# EAGLE board SparkFun RTK Facet - Main-Panel (EAGLE 9.6.2), part 1 of 7
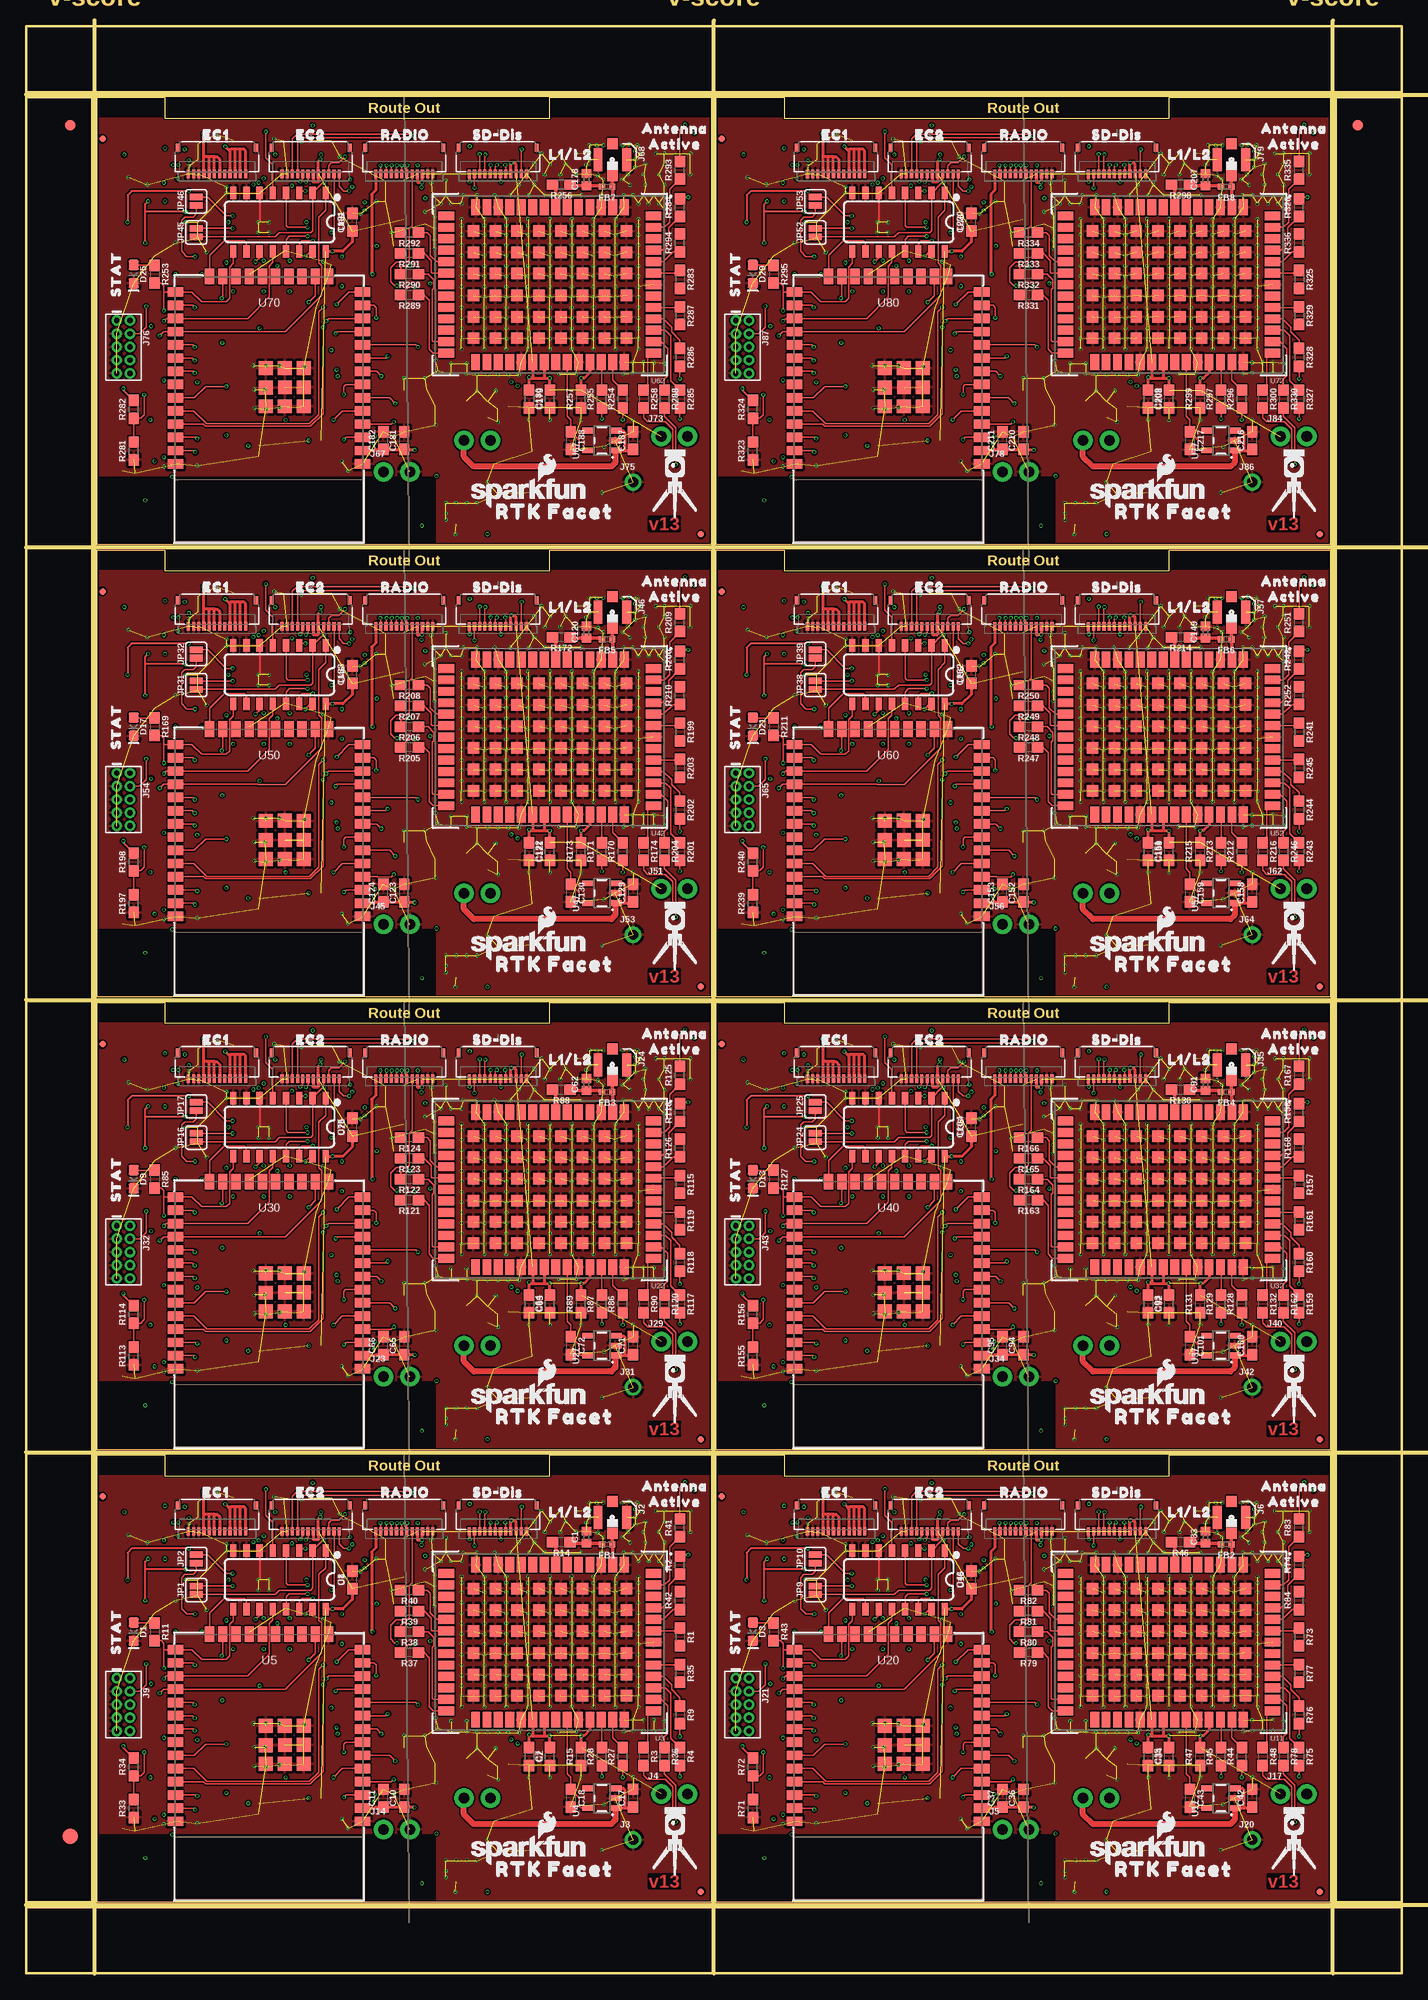
[diagram p0: board, top side]
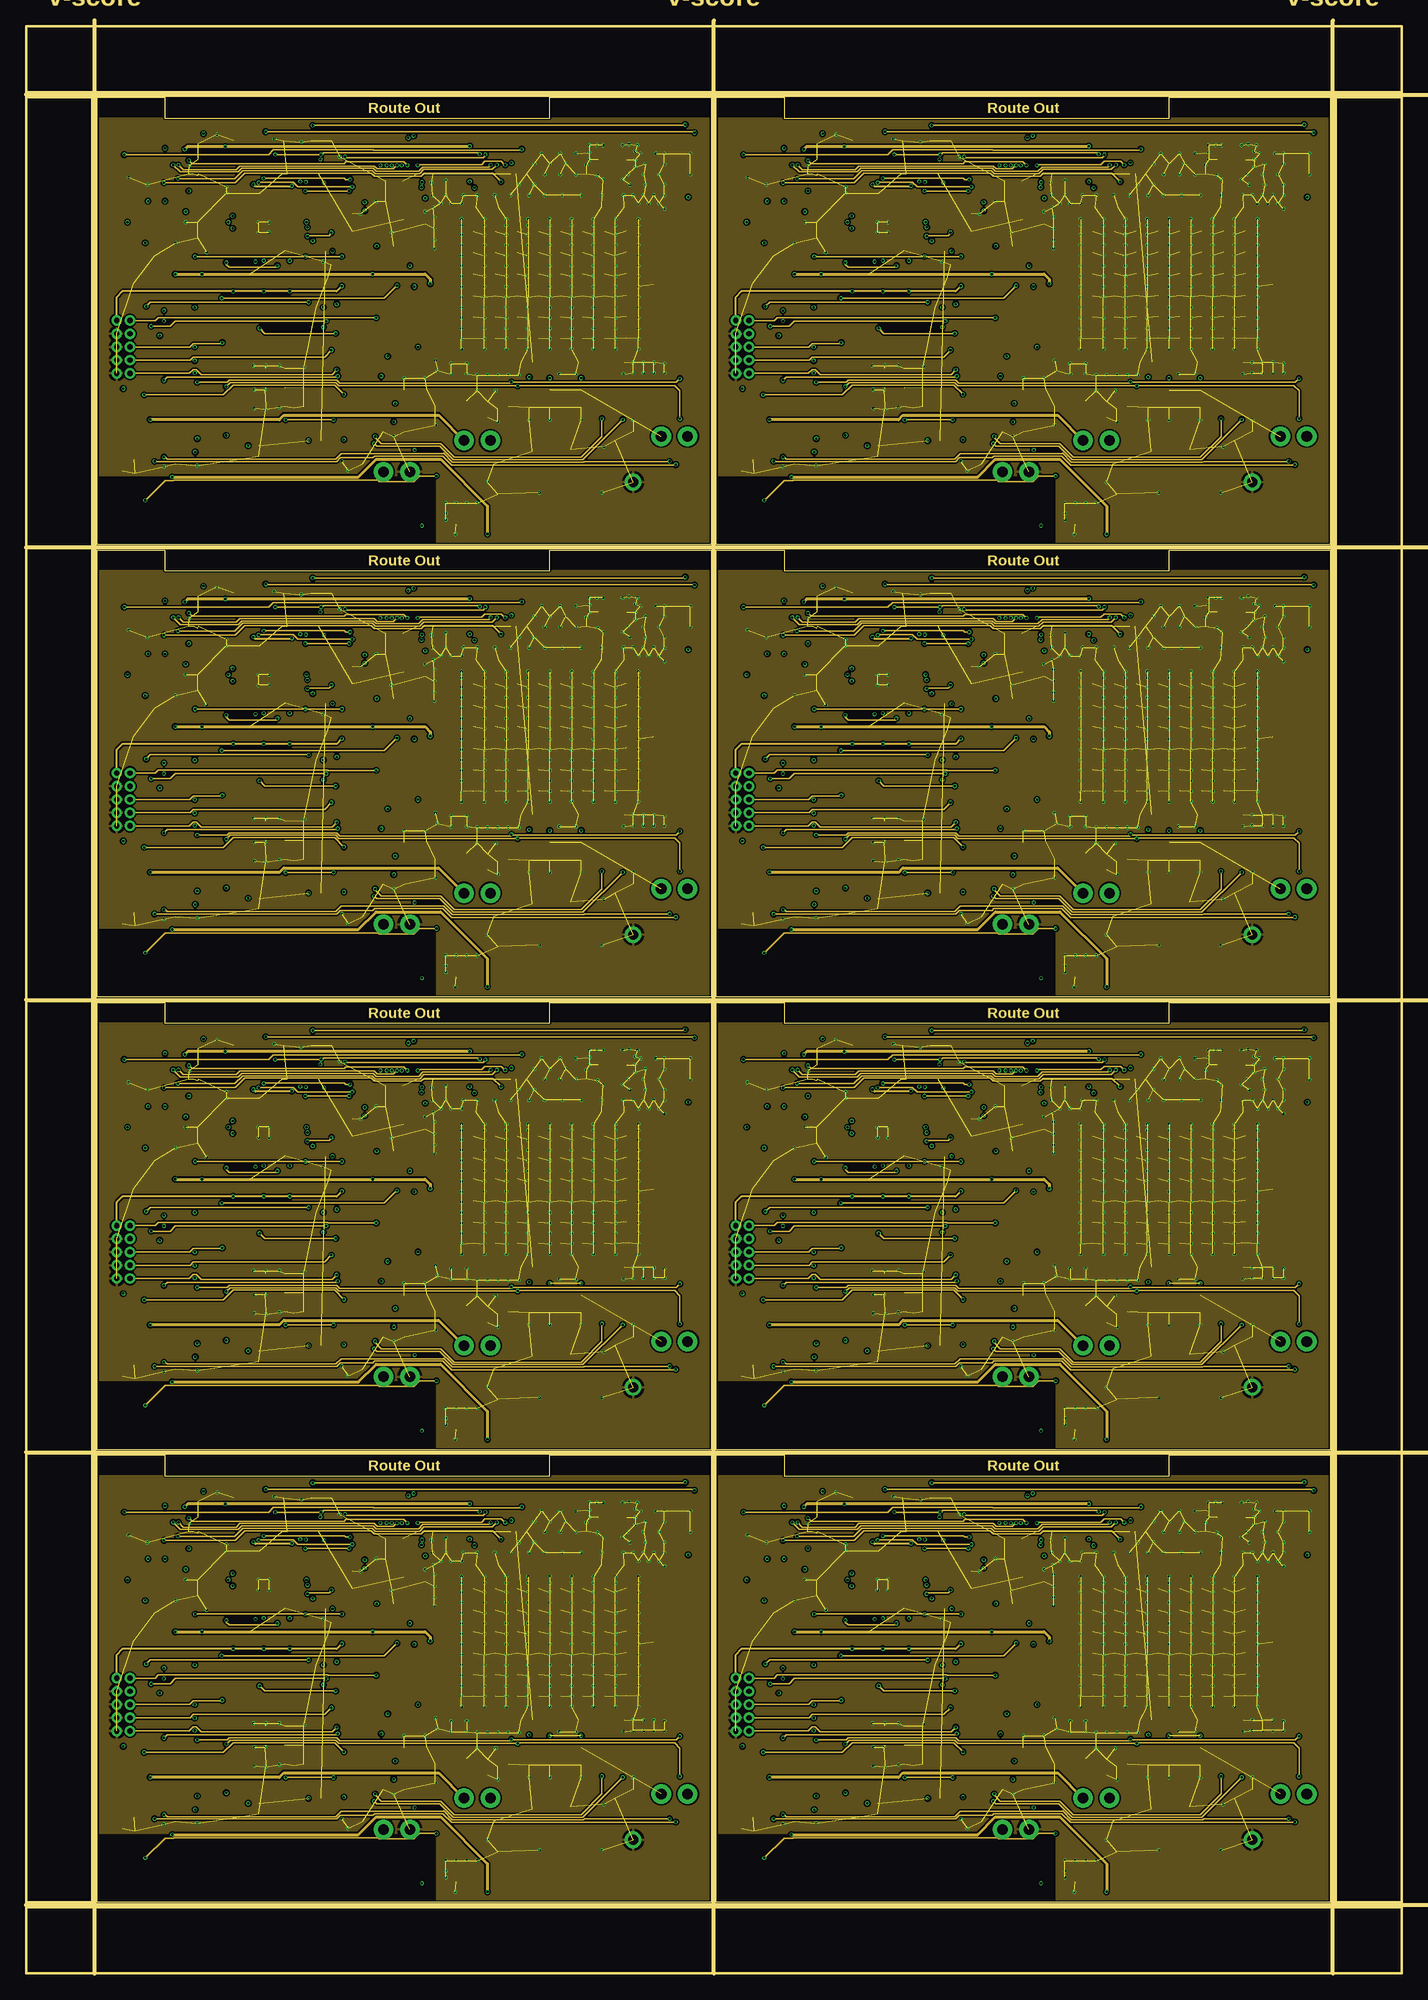
[diagram p1: board, inner layer Route2]
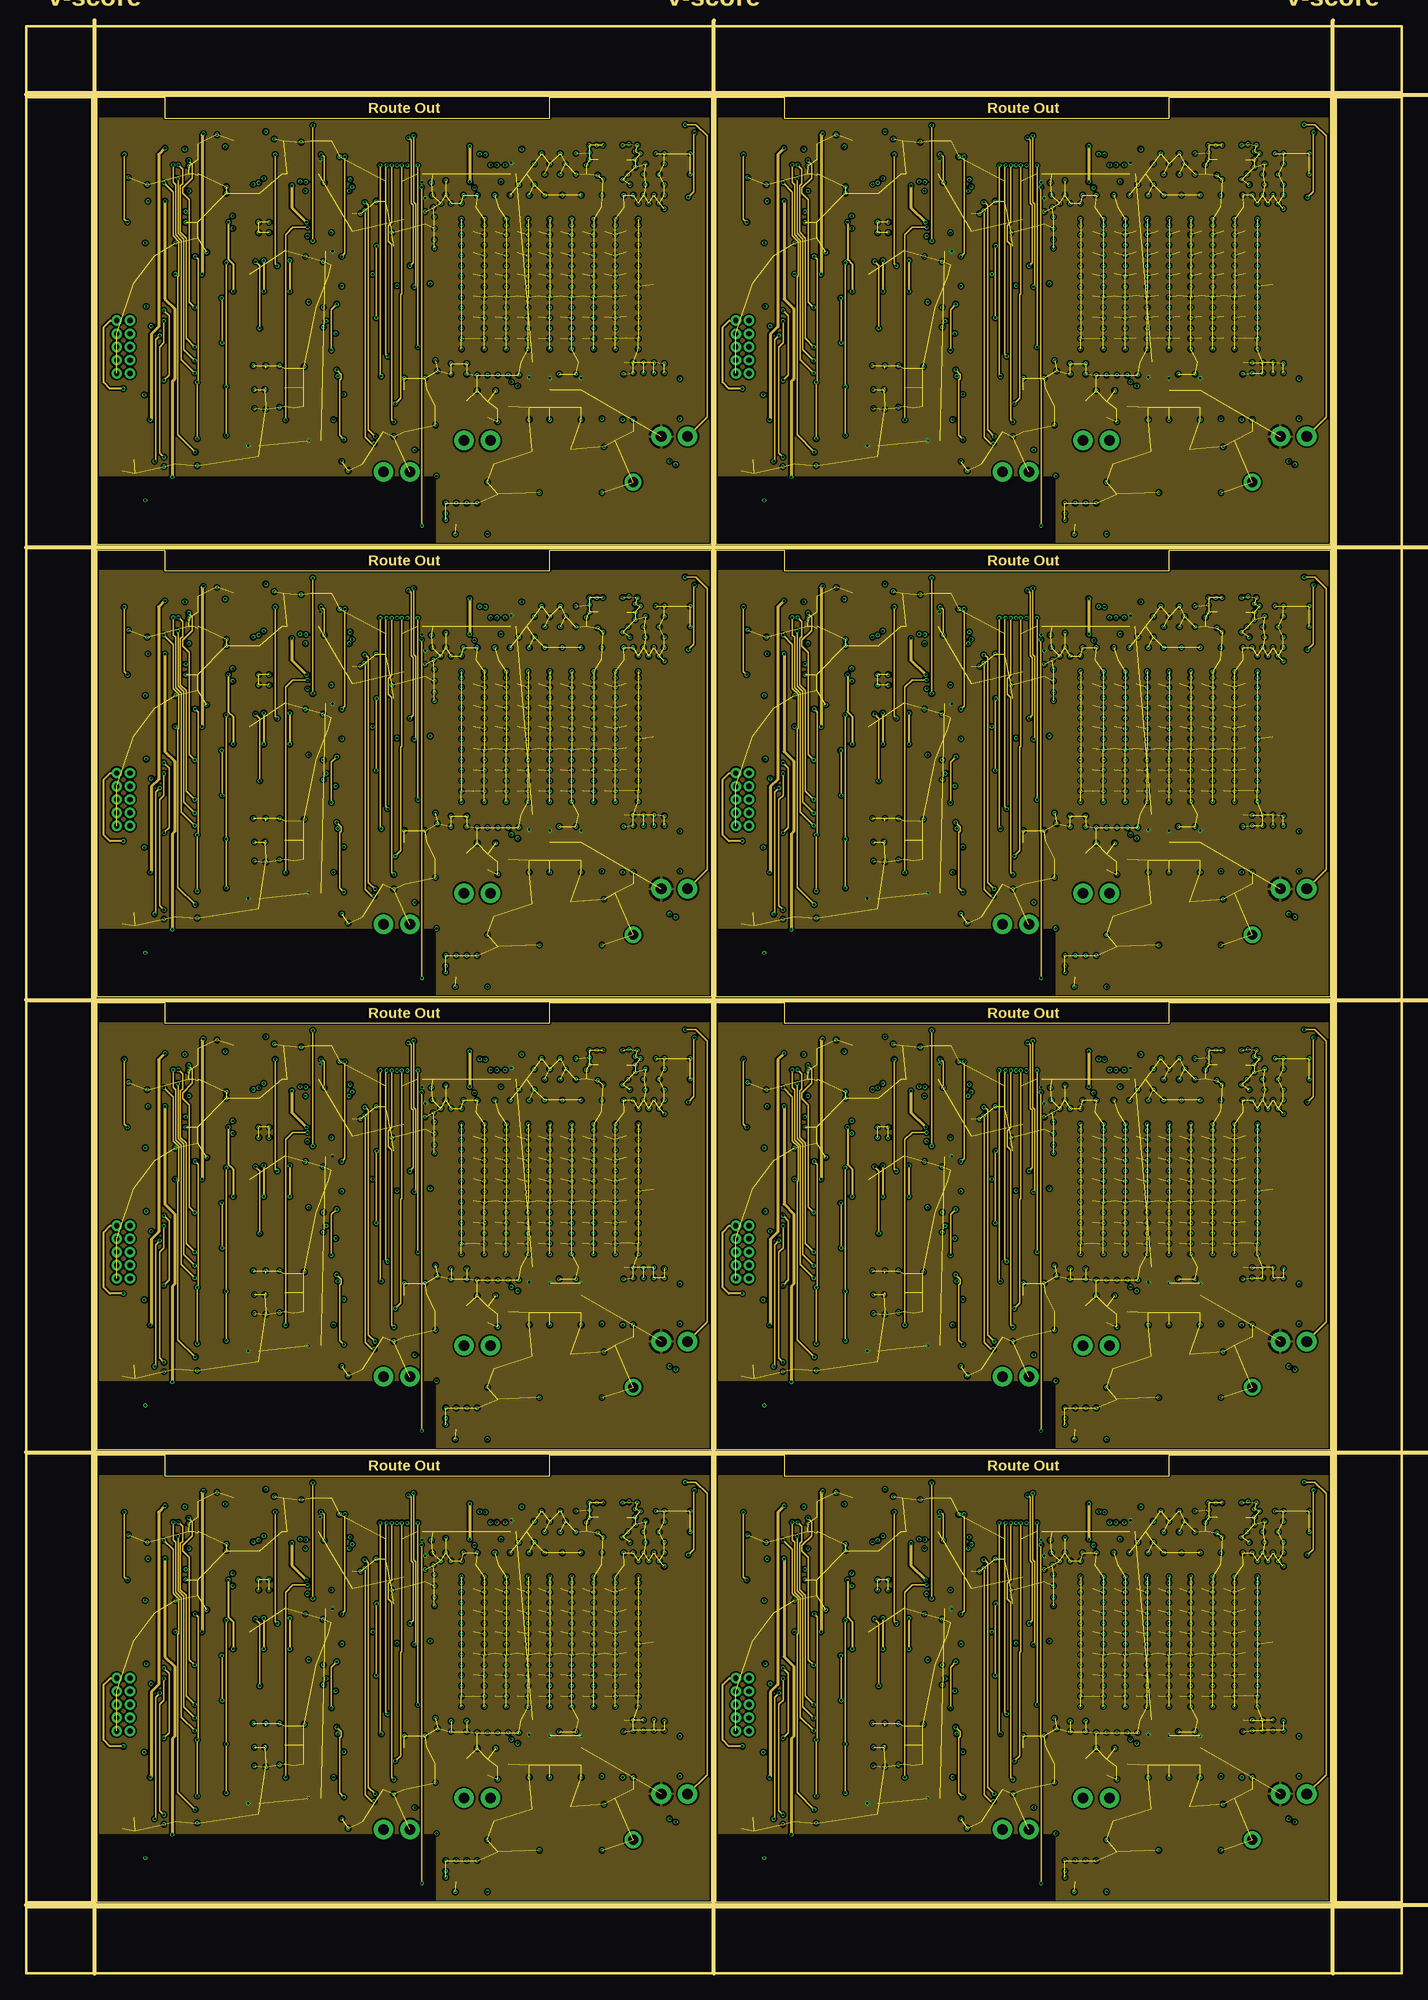
[diagram p2: board, inner layer Route15]
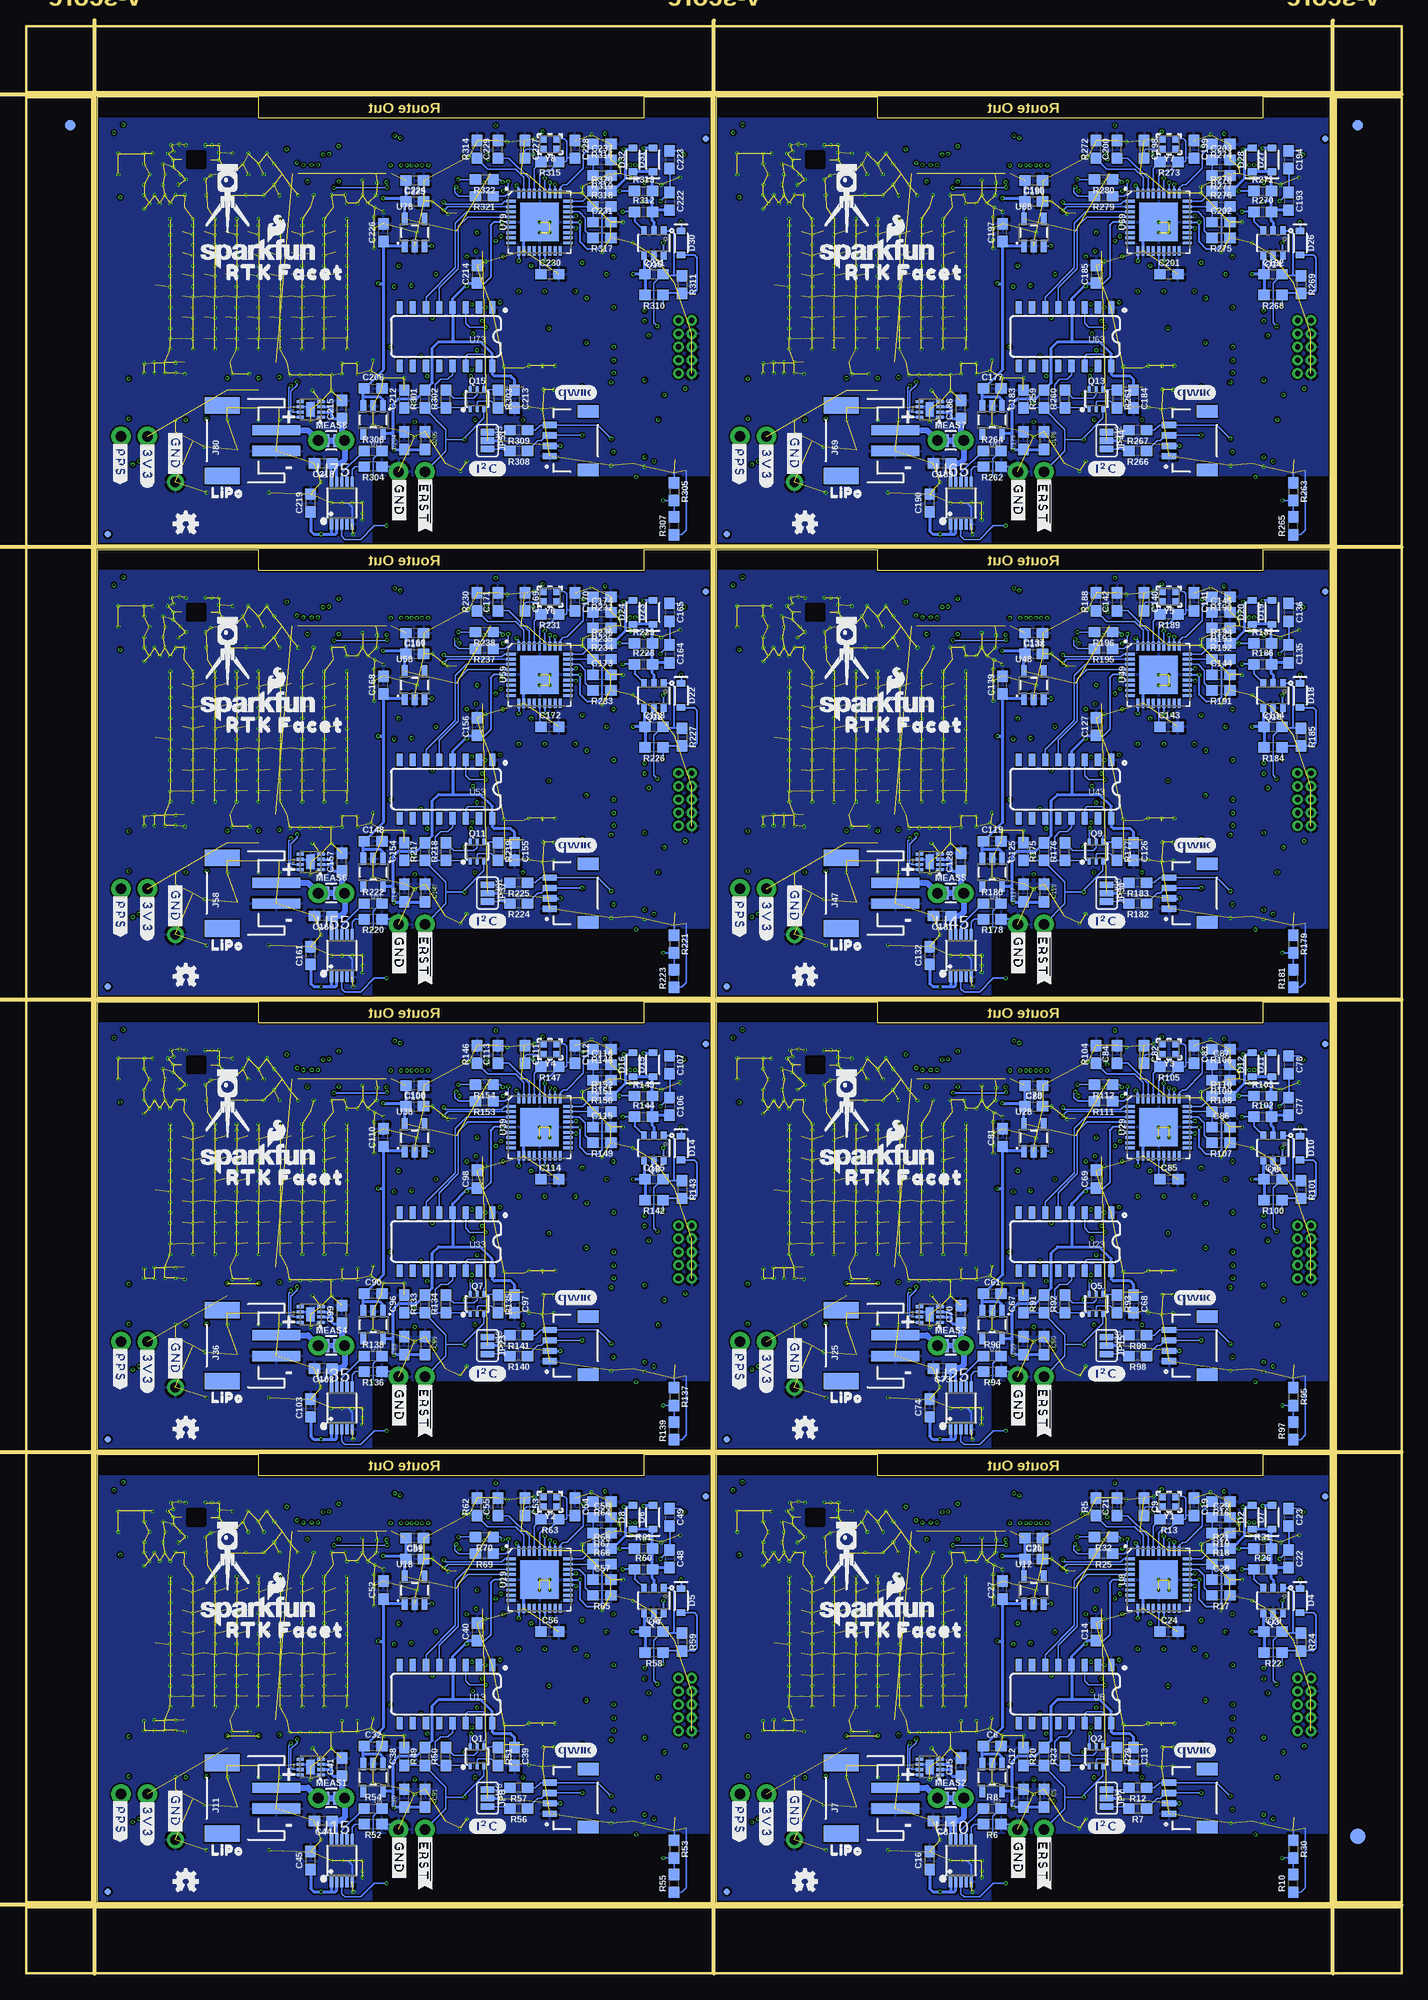
[diagram p3: board, bottom side, seen from below]

Size 132.22 x 187.24 mm. Coordinates in mm from the lower left corner, seen from the top.
Outline: 65.86,49.86 65.86,6.86 6.86,6.86 6.86,49.86 13.36,49.86 13.36,47.86 50.36,47.86 50.36,49.86 65.86,49.86
Outline: 125.37,49.86 125.37,6.86 66.36,6.86 66.36,49.86 72.87,49.86 72.87,47.86 109.87,47.86 109.87,49.86 125.37,49.86
Outline: 65.86,93.37 65.86,50.37 6.86,50.37 6.86,93.37 13.36,93.37 13.36,91.37 50.36,91.37 50.36,93.37 65.86,93.37
Outline: 125.37,93.37 125.37,50.37 66.36,50.37 66.36,93.37 72.87,93.37 72.87,91.37 109.87,91.37 109.87,93.37 125.37,93.37
Outline: 65.86,136.87 65.86,93.87 6.86,93.87 6.86,136.87 13.36,136.87 13.36,134.87 50.36,134.87 50.36,136.87 65.86,136.87
Outline: 125.37,136.87 125.37,93.87 66.36,93.87 66.36,136.87 72.87,136.87 72.87,134.87 109.87,134.87 109.87,136.87 125.37,136.87
Outline: 65.86,180.38 65.86,137.38 6.86,137.38 6.86,180.38 13.36,180.38 13.36,178.38 50.36,178.38 50.36,180.38 65.86,180.38
Outline: 125.37,180.38 125.37,137.38 66.36,137.38 66.36,180.38 72.87,180.38 72.87,178.38 109.87,178.38 109.87,180.38 125.37,180.38
Outline: 0,6.35 132.22,6.35 132.22,0 0,0 0,6.35
Outline: 125.88,180.38 132.22,180.38 132.22,6.86 125.88,6.86 125.88,180.38
Outline: 0,187.24 132.22,187.24 132.22,180.89 0,180.89 0,187.24
Outline: 0,180.38 6.35,180.38 6.35,6.86 0,6.86 0,180.38
Copper layers (1+2*15+16): Top 0.035mm / dielectric 1.5mm / Route2 0.035mm / dielectric 0.15mm / Route15 0.035mm / dielectric 0.2mm / Bottom 0.035mm
Design rules "SparkFun RTK Facet - Main": minimum track width 4mil, minimum drill 0.2mm, track to track 4mil, track to pad 4mil, pad to pad 4mil, via to via 4mil, smd to smd 4mil, copper to edge 6mil, drill to drill 6mil, minimum pad ring 3mil, minimum via ring 3mil, stop-mask expansion 4mil, vias tented up to drill 25mil, thermal gap 10mil
Net classes: 0 default: width 0 mm, drill 0 mm; 1 power: width 0.178 mm; 3 RF: width 0.33 mm, clearance 0.203 mm
tKeepout: area 6.9,6.9 to 8.9,49.9; area 63.9,6.9 to 65.9,49.9; area 66.4,6.9 to 68.4,49.9; area 123.4,6.9 to 125.4,49.9; area 6.9,50.4 to 8.9,93.4; area 63.9,50.4 to 65.9,93.4; area 66.4,50.4 to 68.4,93.4; area 123.4,50.4 to 125.4,93.4; area 6.9,93.9 to 8.9,136.9; area 63.9,93.9 to 65.9,136.9; area 66.4,93.9 to 68.4,136.9; area 123.4,93.9 to 125.4,136.9; area 6.9,137.4 to 8.9,180.4; area 63.9,137.4 to 65.9,180.4; area 66.4,137.4 to 68.4,180.4; area 123.4,137.4 to 125.4,180.4
bKeepout: area 6.9,6.9 to 8.9,49.9; area 63.9,6.9 to 65.9,49.9; area 66.4,6.9 to 68.4,49.9; area 123.4,6.9 to 125.4,49.9; area 6.9,50.4 to 8.9,93.4; area 63.9,50.4 to 65.9,93.4; area 66.4,50.4 to 68.4,93.4; area 123.4,50.4 to 125.4,93.4; area 6.9,93.9 to 8.9,136.9; area 63.9,93.9 to 65.9,136.9; area 66.4,93.9 to 68.4,136.9; area 123.4,93.9 to 125.4,136.9; area 6.9,137.4 to 8.9,180.4; area 63.9,137.4 to 65.9,180.4; area 66.4,137.4 to 68.4,180.4; area 123.4,137.4 to 125.4,180.4
tRestrict: area 15.8,42.4 to 16,42.7; area 16.3,42.4 to 16.5,42.7; area 24.8,42.4 to 25,42.7; area 38.8,42.4 to 39,42.7; area 16.8,42.4 to 16.9,42.7; area 25.3,42.4 to 25.5,42.7; area 38.4,42.4 to 38.5,42.7; area 75.3,42.4 to 75.5,42.7; area 75.8,42.4 to 76,42.7; area 84.3,42.4 to 84.5,42.7; area 98.3,42.4 to 98.5,42.7; area 76.3,42.4 to 76.4,42.7; area 84.8,42.4 to 85,42.7; area 97.9,42.4 to 98,42.7; area 15.8,85.9 to 16,86.2; area 16.3,85.9 to 16.5,86.2; area 24.8,85.9 to 25,86.2; area 38.8,85.9 to 39,86.2; area 16.8,85.9 to 16.9,86.2; area 25.3,85.9 to 25.5,86.2; area 38.4,85.9 to 38.5,86.2; area 75.3,85.9 to 75.5,86.2; area 75.8,85.9 to 76,86.2; area 84.3,85.9 to 84.5,86.2; area 98.3,85.9 to 98.5,86.2; area 76.3,85.9 to 76.4,86.2; area 84.8,85.9 to 85,86.2; area 97.9,85.9 to 98,86.2; area 15.8,129.4 to 16,129.7; area 16.3,129.4 to 16.5,129.7; area 24.8,129.4 to 25,129.7; area 38.8,129.4 to 39,129.7; area 16.8,129.4 to 16.9,129.7; area 25.3,129.4 to 25.5,129.7; area 38.4,129.4 to 38.5,129.7; area 75.3,129.4 to 75.5,129.7; area 75.8,129.4 to 76,129.7; area 84.3,129.4 to 84.5,129.7; area 98.3,129.4 to 98.5,129.7; area 76.3,129.4 to 76.4,129.7; area 84.8,129.4 to 85,129.7; area 97.9,129.4 to 98,129.7; area 15.8,172.9 to 16,173.2; area 16.3,172.9 to 16.5,173.2; area 24.8,172.9 to 25,173.2; area 38.8,172.9 to 39,173.2; area 16.8,172.9 to 16.9,173.2; area 25.3,172.9 to 25.5,173.2; area 38.4,172.9 to 38.5,173.2; area 75.3,172.9 to 75.5,173.2; area 75.8,172.9 to 76,173.2; area 84.3,172.9 to 84.5,173.2; area 98.3,172.9 to 98.5,173.2; area 76.3,172.9 to 76.4,173.2; area 84.8,172.9 to 85,173.2; area 97.9,172.9 to 98,173.2
Milling: 8 lines

## Footprints (pad centres in the part's own frame; a part is rotated, then mirrored left to right if it is on the bottom)
0402 = smd 0.85 x 0.9: 1 -0.58,0; 2 0.58,0
0603 = smd 1.1 x 1: 1 -0.85,0; 2 0.85,0
LED-0603 = smd 1 x 1: A -0.877,0; C 0.877,0
SOD-323 = smd 0.63 x 0.83: A 1.15,0; C -1.15,0
FIDUCIAL-1X2 = smd 1 x 1: 1 0,0
FIDUCIAL-1.5X3 = smd 1.5 x 1.5: 1 0,0
0402-TIGHT = smd 0.6 x 0.6: 1 -0.5,0; 2 0.5,0
JST04_1MM_RA = smd 0.6 x 1.35: 1 -1.5,0; 2 -0.5,0; 3 0.5,0; 4 1.5,0 | smd 1.2 x 2: NC1 2.8,-3.675; NC2 -2.8,-3.675
U.FL = smd 2.2 x 0.85: 1 0,1.375; 2 0,-1.375 | smd 1.05 x 1: FEED 1.525,0; NC -1.525,0
1X01_NO_SILK = drill 0.95 pad 1.6: 1 0,0
1X02_NO_SILK = drill 1.016 pad 1.88: 1 0,0; 2 2.54,0
JST-2-SMD = smd 1 x 4.6: 1 -1,-3.7; 2 1,-3.7 | smd 1.6 x 3.4: NC1 -3.4,1.5; NC2 3.4,1.5
FPC_12_DOUBLESIDED_BACKFLIP = smd 0.3 x 0.8: 1 -2.75,1.35; 2 -2.25,1.35; 3 -1.75,1.35; 4 -1.25,1.35; 5 -0.75,1.35; 6 -0.25,1.35; 7 0.25,1.35; 8 0.75,1.35; 9 1.25,1.35; 10 1.75,1.35; 11 2.25,1.35; 12 2.75,1.35 | smd 0.4 x 0.8: MP1 -3.75,-1.15; MP2 3.75,-1.15
2X5-PTH-1.27MM = drill 0.508 pad 1: 1 -2.54,-0.635; 2 -2.54,0.635; 3 -1.27,-0.635; 4 -1.27,0.635; 5 0,-0.635; 6 0,0.635; 7 1.27,-0.635; 8 1.27,0.635; 9 2.54,-0.635; 10 2.54,0.635
SMT-JUMPER_2_NO_SILK = smd 0.635 x 1.27: 1 -0.406,0; 2 0.406,0
FIDUCIAL-MICRO = smd 0.635 x 0.635: 1 0,0
SMT-JUMPER_3_NO_SILK = smd 0.635 x 1.27: 1 -0.813,0; 2 0,0; 3 0.813,0
COMBO-JUMPER_2_NC_TRACE = smd 0.635 x 1.27: 1 -0.508,0; 2 0.508,0 | drill 1.016 pad 1.88: 3 -1.27,0; 4 1.27,0
SC70-6 = smd 0.3 x 0.66: 1 -0.65,-0.92; 2 0,-0.92; 3 0.65,-0.92; 4 0.65,0.92; 5 0,0.92; 6 -0.65,0.92
SOT26 = smd 0.55 x 0.8: D1 -0.95,1.2; D2 0.95,1.2; G1 -0.95,-1.2; G2 0.95,-1.2; S1 0,1.2; S2 0,-1.2
SO16 = smd 0.6 x 1.2: 1 -4.445,-2.8; 2 -3.175,-2.8; 3 -1.905,-2.8; 4 -0.635,-2.8; 5 0.635,-2.8; 6 1.905,-2.8; 7 3.175,-2.8; 8 4.445,-2.8; 9 4.445,2.8; 10 3.175,2.8; 11 1.905,2.8; 12 0.635,2.8; 13 -0.635,2.8; 14 -1.905,2.8; 15 -3.175,2.8; 16 -4.445,2.8
SOT23-5 = smd 0.55 x 1.2: 1 -0.95,-1.3; 2 0,-1.3; 3 0.95,-1.3; 4 0.95,1.3; 5 -0.95,1.3
ZED-F9P = smd 0.85 x 1.52: 1 -7.15,-7.45; 2 -6.05,-7.45; 3 -4.95,-7.45; 4 -3.85,-7.45; 5 -2.75,-7.45; 6 -1.65,-7.45; 7 -0.55,-7.45; 8 0.55,-7.45; 9 1.65,-7.45; 10 2.75,-7.45; 11 3.85,-7.45; 12 4.95,-7.45; 13 6.05,-7.45; 14 7.15,-7.45; 28 7.15,7.45; 29 6.05,7.45; 30 4.95,7.45; 31 3.85,7.45; 32 2.75,7.45; 33 1.65,7.45; 34 0.55,7.45; 35 -0.55,7.45; 36 -1.65,7.45; 37 -2.75,7.45; 38 -3.85,7.45; 39 -4.95,7.45; 40 -6.05,7.45; 41 -7.15,7.45 | smd 1.52 x 0.85: 15 9.95,-6.6; 16 9.95,-5.5; 17 9.95,-4.4; 18 9.95,-3.3; 19 9.95,-2.2; 20 9.95,-1.1; 21 9.95,0; 22 9.95,1.1; 23 9.95,2.2; 24 9.95,3.3; 25 9.95,4.4; 26 9.95,5.5; 27 9.95,6.6; 42 -9.95,6.6; 43 -9.95,5.5; 44 -9.95,4.4; 45 -9.95,3.3; 46 -9.95,2.2; 47 -9.95,1.1; 48 -9.95,0; 49 -9.95,-1.1; 50 -9.95,-2.2; 51 -9.95,-3.3; 52 -9.95,-4.4; 53 -9.95,-5.5; 54 -9.95,-6.6 | smd 1.1 x 1.1: 55 -1.05,-1.05; 56 -3.15,-1.05; 57 -5.25,-1.05; 58 -7.35,-1.05; 59 -1.05,-3.1; 60 -3.15,-3.1; 61 -5.25,-3.1; 62 -7.35,-3.1; 63 -1.05,-5.15; 64 -3.15,-5.15; 65 -5.25,-5.15; 66 -7.35,-5.15; 67 -1.05,5.15; 68 -3.15,5.15; 69 -5.25,5.15; 70 -7.35,5.15; 71 -1.05,3.1; 72 -3.15,3.1; 73 -5.25,3.1; 74 -7.35,3.1; 75 -1.05,1.05; 76 -3.15,1.05; 77 -5.25,1.05; 78 -7.35,1.05; 79 1.05,1.05; 80 3.15,1.05; 81 5.25,1.05; 82 7.35,1.05; 83 1.05,3.1; 84 3.15,3.1; 85 5.25,3.1; 86 7.35,3.1; 87 1.05,5.15; 88 3.15,5.15; 89 5.25,5.15; 90 7.35,5.15; 91 1.05,-5.15; 92 3.15,-5.15; 93 5.25,-5.15; 94 7.35,-5.15; 95 1.05,-3.1; 96 3.15,-3.1; 97 5.25,-3.1; 98 7.35,-3.1; 99 1.05,-1.05; 100 3.15,-1.05; 101 5.25,-1.05; 102 7.35,-1.05
ESP-WROOM-32D-DFM_PASTE = smd 0.9 x 1.5: 1 6.43,9; 2 5.16,9; 3 3.89,9; 4 2.62,9; 5 1.35,9; 6 0.08,9; 7 -1.19,9; 8 -2.46,9; 9 -3.73,9; 10 -5,9; 11 -6.27,9; 12 -7.54,9; 13 -8.81,9; 14 -10.08,9; 25 -10.08,-9; 26 -8.81,-9; 27 -7.54,-9; 28 -6.27,-9; 29 -5,-9; 30 -3.73,-9; 31 -2.46,-9; 32 -1.19,-9; 33 0.08,-9; 34 1.35,-9; 35 2.62,-9; 36 3.89,-9; 37 5.16,-9; 38 6.43,-9 | smd 1.5 x 0.9: 15 -11.57,5.715; 16 -11.57,4.445; 17 -11.57,3.175; 18 -11.57,1.905; 19 -11.57,0.635; 20 -11.57,-0.635; 21 -11.57,-1.905; 22 -11.57,-3.175; 23 -11.57,-4.445; 24 -11.57,-5.715 | smd 1.33 x 1.33: GND -0.912,1.531; GNDT1 -2.751,3.346; GNDT2 -2.761,1.516; GNDT3 -2.751,-0.314; GNDT4 -0.891,-0.324; GNDT5 0.909,-0.314; GNDT6 0.909,1.516; GNDT7 0.909,3.346; GNDT8 -0.921,3.346
SO016 = smd 0.6 x 1.2: 1 -4.445,-2.8; 2 -3.175,-2.8; 3 -1.905,-2.8; 4 -0.635,-2.8; 5 0.635,-2.8; 6 1.905,-2.8; 7 3.175,-2.8; 8 4.445,-2.8; 9 4.445,2.8; 10 3.175,2.8; 11 1.905,2.8; 12 0.635,2.8; 13 -0.635,2.8; 14 -1.905,2.8; 15 -3.175,2.8; 16 -4.445,2.8
DFN-8 = smd 0.3 x 0.7: 1 -0.75,-0.99; 2 -0.25,-0.99; 3 0.25,-0.99; 4 0.75,-0.99; 5 0.75,0.99; 6 0.25,0.99; 7 -0.25,0.99; 8 -0.75,0.99 | smd 1.38 x 0.8: 9 0,0
QFN-36 = smd 0.9 x 0.28: 1 -2.75,2; 2 -2.75,1.5; 3 -2.75,1; 4 -2.75,0.5; 5 -2.75,0; 6 -2.75,-0.5; 7 -2.75,-1; 8 -2.75,-1.5; 9 -2.75,-2; 19 2.75,-2; 20 2.75,-1.5; 21 2.75,-1; 22 2.75,-0.5; 23 2.75,0; 24 2.75,0.5; 25 2.75,1; 26 2.75,1.5; 27 2.75,2 | smd 0.28 x 0.9: 10 -2,-2.75; 11 -1.5,-2.75; 12 -1,-2.75; 13 -0.5,-2.75; 14 0,-2.75; 15 0.5,-2.75; 16 1,-2.75; 17 1.5,-2.75; 18 2,-2.75; 28 2,2.75; 29 1.5,2.75; 30 1,2.75; 31 0.5,2.75; 32 0,2.75; 33 -0.5,2.75; 34 -1,2.75; 35 -1.5,2.75; 36 -2,2.75 | smd 3.7 x 3.7: EP 0,0
MSOP10 = smd 0.3 x 1: 1 -1,-2.05; 2 -0.5,-2.05; 3 0,-2.05; 4 0.5,-2.05; 5 1,-2.05; 6 1,2.05; 7 0.5,2.05; 8 0,2.05; 9 -0.5,2.05; 10 -1,2.05
CRYSTAL-SMD-2.0X1.6MM = smd 0.75 x 0.7: 1 -0.675,-0.5; 2 0.675,-0.5; 3 0.675,0.5; 4 -0.675,0.5